# EAGLE board tip41c-li-iron-charger-v0 (EAGLE 5.07)
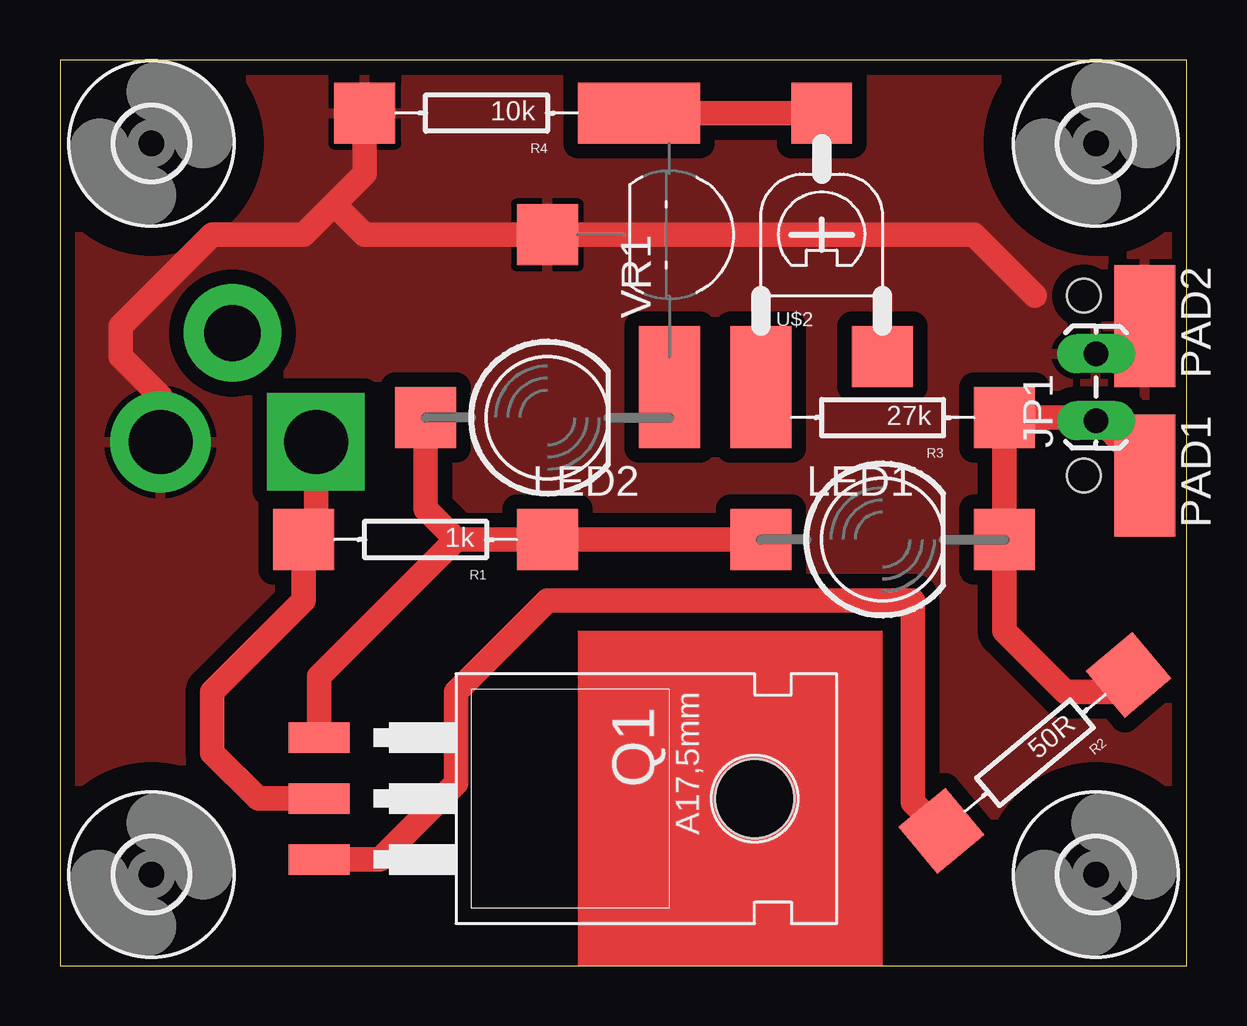
[diagram p0: board, top side]
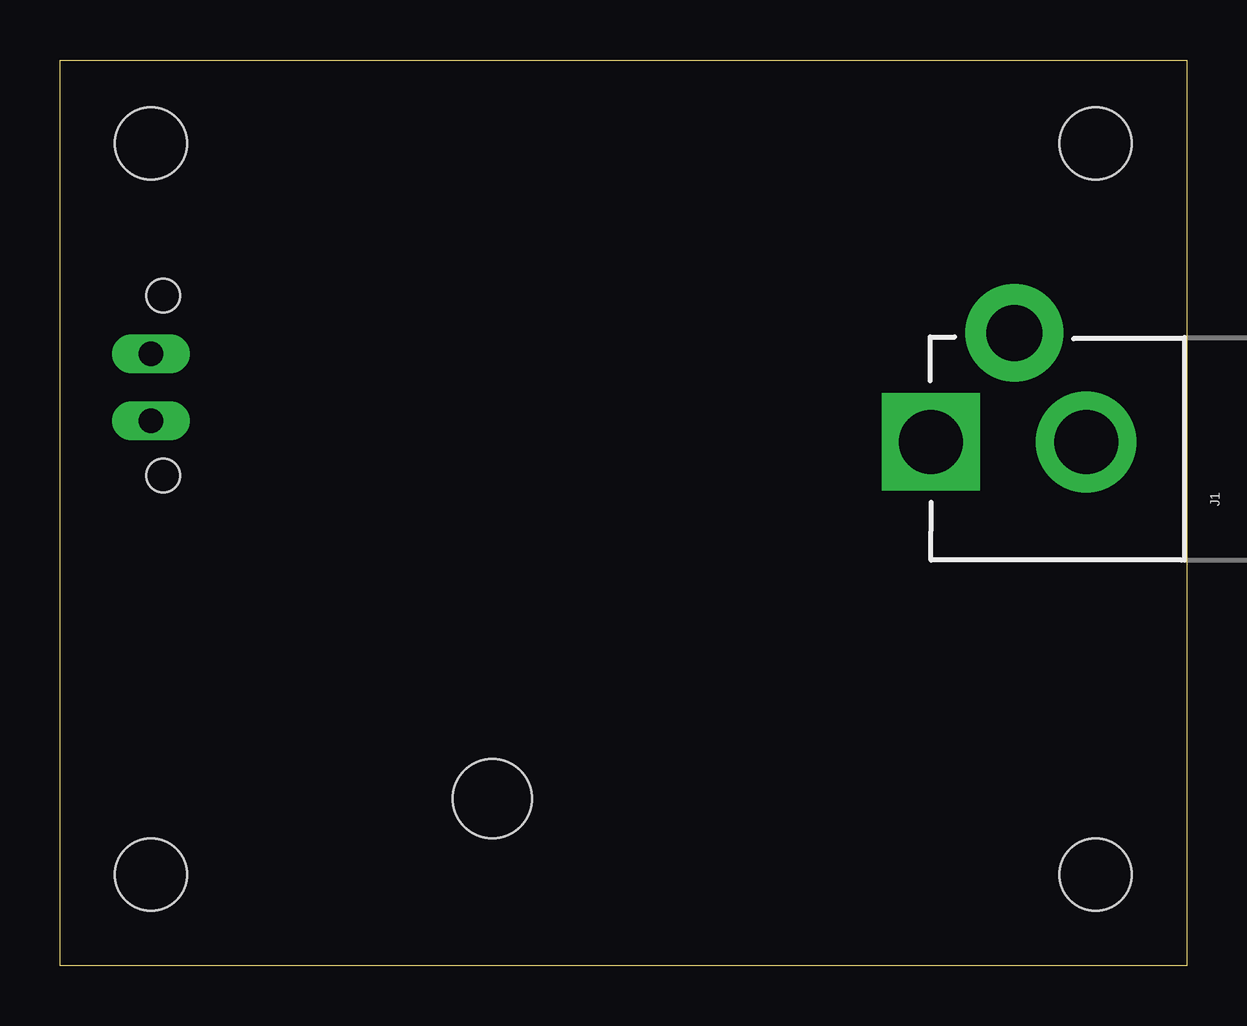
[diagram p1: board, bottom side, seen from below]

Size 46.97 x 37.77 mm. Coordinates in mm from the lower left corner, seen from the top.
Outline: 0,0 46.97,0 46.97,37.77 0,37.77 0,0
Copper layers (1*16): Top 0.035mm / dielectric 1.5mm / Bottom 0.035mm
Design rules "SparkFun *": minimum track width 8mil, minimum drill 20mil, track to track 8mil, track to pad 8mil, pad to pad 8mil, via to via 8mil, smd to smd 0mil, copper to edge 10mil, drill to drill 8mil, minimum pad ring 12mil, minimum via ring 10mil, stop-mask expansion 4mil, vias tented up to drill 25mil, thermal gap 10mil
Holes 1.4 mm at 42.67,27.94 42.67,20.45

## Footprints (pad centres in the part's own frame; a part is rotated, then mirrored left to right if it is on the bottom)
3,0 = hole 3: 0,0
POWER_JACK_2.1X5.5_BIG_PTH = drill 2.667 pad 4.191 round: GND 0,-0.127 | drill 2.337 pad 4.064 round: GNDBREAK 4.547,2.87 | drill 2.667 pad 4.064 square: PWR 0,6.35
1X02_LOCK_LONGPADS = drill 1.016 long: 1 -0.127,0; 2 2.667,0
LED-RF = smd 2.54 x 2.54: A -5.08,0; K 5.08,0
SMD2,54-5,08 = smd 2.54 x 5.08: 1 0,0
TO220-RF = smd 1.27 x 2.54: 1 -1.905,-6.985; 2 0.635,-6.985; 3 3.175,-6.985 | hole 3.302: 0.635,11.176
AXIAL-0.3-SMD = smd 2.54 x 2.54: P$1 -5.08,0; P$2 5.08,0
POT_SMD_BLUE_WHITE = smd 2.54 x 2.54: A -2.54,-5.08; E 2.54,-5.08; S 0,5.08
TO92-RAC-RF = smd 2.54 x 2.54: A 0,-5.08; C 5.08,0; R -5.08,0

## Placement (x,y rotation side)
H1  MOUNT-HOLE3.0  [3,0]  43.18,34.29 0 top
H2  MOUNT-HOLE3.0  [3,0]  3.81,34.29 0 top
H3  MOUNT-HOLE3.0  [3,0]  3.81,3.81 0 top
H4  MOUNT-HOLE3.0  [3,0]  43.18,3.81 0 top
J1  POWER  [POWER_JACK_2.1X5.5_BIG_PTH]  4.32,21.84 90 bottom
JP1  [1X02_LOCK_LONGPADS]  43.18,22.86 90 top
LED1  red  [LED-RF]  34.29,17.78 0 top
LED2  Green  [LED-RF]  20.32,22.86 0 top
PAD1  WIREPADSMD2,54-5,08  [SMD2,54-5,08]  45.21,20.45 180 top
PAD2  WIREPADSMD2,54-5,08  [SMD2,54-5,08]  45.21,26.67 180 top
Q1  TIP41C  [TO220-RF]  17.78,7.62 270 top
R1  1k  [AXIAL-0.3-SMD]  15.24,17.78 180 top
R2  50R  [AXIAL-0.3-SMD]  40.64,8.89 219.8 top
R3  27k  [AXIAL-0.3-SMD]  34.29,22.86 180 top
R4  10k  [AXIAL-0.3-SMD]  17.78,35.56 180 top
U$2  5k  [POT_SMD_BLUE_WHITE]  31.75,30.48 0 top
VR1  TL431  [TO92-RAC-RF]  25.4,30.48 270 top

## Library data of the parts
H1-H4 = holes
J1 LED1 LED2 Q1 R1-R4 U$2 VR1 = digital-toy
JP1 = SparkFun
PAD1 PAD2 = wirepad

## Nets
GND: J1.GND JP1.2 PAD2.1 R4.P$2 VR1.A
N$1: Q1.3 R2.P$2
N$2: LED2.K VR1.C
N$3: LED1.A LED2.A Q1.1 R1.P$1
N$4: JP1.1 LED1.K PAD1.1 R2.P$1 R3.P$1
N$5: R4.P$1 U$2.S VR1.R
N$6: R3.P$2 U$2.A
VCC: J1.PWR Q1.2 R1.P$2

## Tracks (layer width: path | path; a pad name or v marks a point on that pad's centre or on a via)
GND
  Top 1.016: 40.64,27.94 38.1,30.48 VR1.A 12.7,30.48 11.43,31.75 | JP1.2 44.07,25.53 PAD2.1 | J1.GND 4.19,23.75 2.54,25.4 2.54,26.67 6.35,30.48 10.16,30.48 11.43,31.75 | 11.43,31.75 12.7,33.02 R4.P$2
  pour Top (isolate 0.61): -6.35,44.45 57.15,43.18 60.96,-2.54 -7.62,-5.08
N$1
  Top 1.016: Q1.3 13.34,4.45 16.51,7.62 16.51,11.43 20.32,15.24 35.56,15.24 35.56,6.82 R2.P$2
N$2
  Top 1.016: LED2.K VR1.C
N$3
  Top 1.016: LED1.A R1.P$1 16.51,17.78 | Q1.1 10.79,12.07 16.51,17.78 | LED2.A 15.24,19.05 16.51,17.78
N$4
  Top 1.016: 43.31,22.86 R3.P$1 LED1.K 39.37,13.97 41.91,11.43 43.83,11.43 R2.P$1 | 43.31,22.86 JP1.1 | 43.31,22.86 44.45,21.59 PAD1.1
N$5
  Top 1.016: R4.P$1 VR1.R U$2.S
N$6
  Top 1.016: R3.P$2 U$2.A
VCC
  Top 1.016: Q1.2 8.26,6.99 6.35,8.89 6.35,11.43 10.16,15.24 R1.P$2 10.67,18.29 J1.PWR